# EAGLE board solarclock-touch-voltagelimit (EAGLE 5.11)
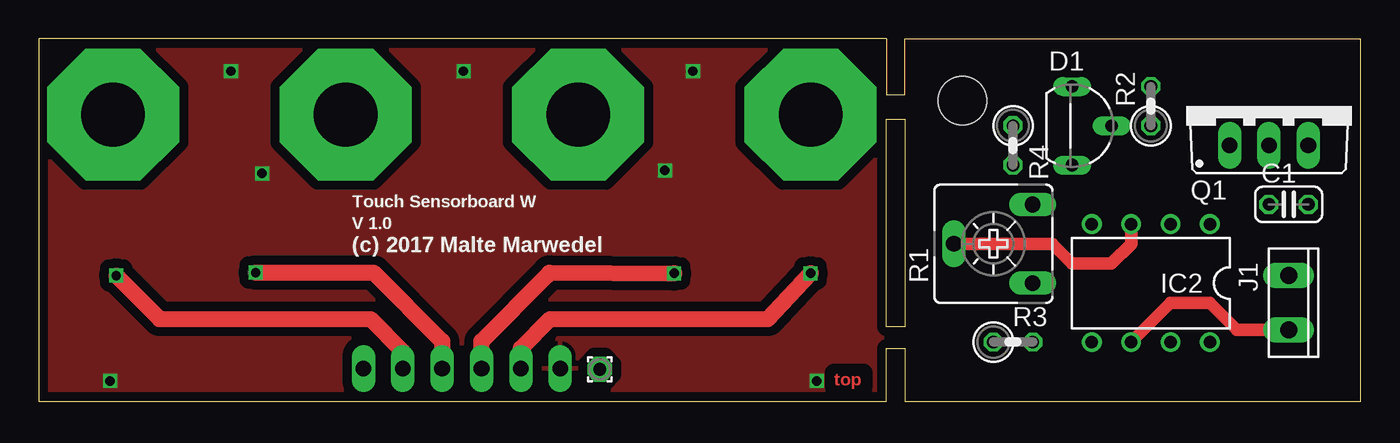
[diagram p0: board, top side]
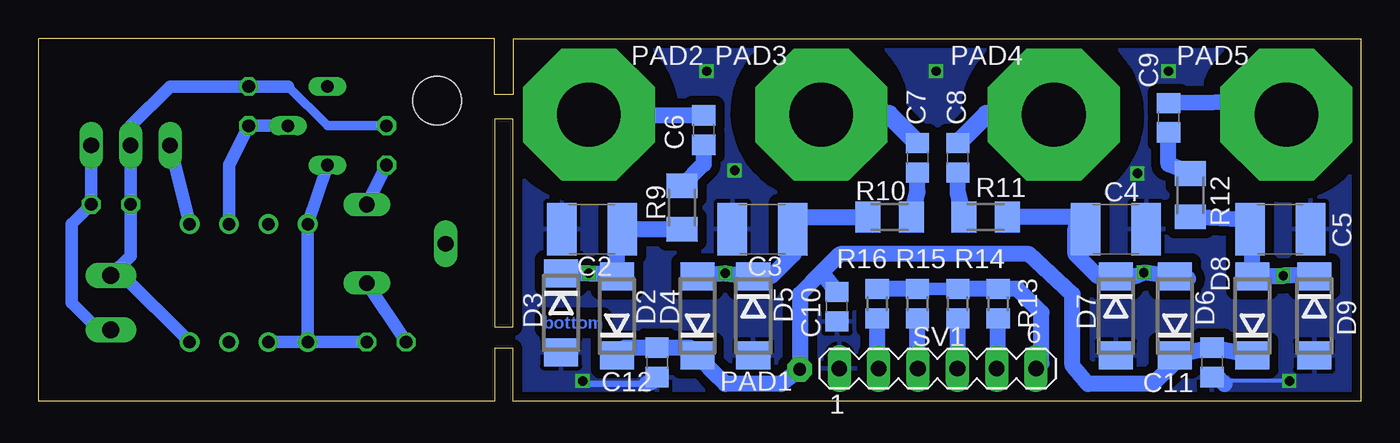
[diagram p1: board, bottom side, seen from below]

Size 85.3 x 23.4 mm. Coordinates in mm from the lower left corner, seen from the top.
Outline: 85.3,0 85.3,23.4 55.9,23.4 55.9,19.8 54.7,19.8 54.7,23.4 0,23.4 0,0 54.7,0 54.7,3.4 55.9,3.4 55.9,0 85.3,0
Outline: 55.9,18.2 55.9,4.8 54.7,4.8 54.7,18.2 55.9,18.2
Copper layers (1*16): Top 0.035mm / dielectric 1.6mm / Bottom 0.035mm
Design rules "Elecrow_2-layer_PCB_eagle_rule": minimum track width 6mil, minimum drill 12mil, track to track 6mil, track to pad 6mil, pad to pad 6mil, via to via 8mil, smd to smd 0mil, copper to edge 20mil, drill to drill 10mil, minimum pad ring 6mil, minimum via ring 6mil, stop-mask expansion 0mil, vias tented up to drill 100mil, thermal gap 10mil
Holes 3.1 mm at 59.6,19.4
bRestrict: 4 lines

## Footprints (pad centres in the part's own frame; a part is rotated, then mirrored left to right if it is on the bottom)
C025-024X044 = drill 0.813 octagon: 1 -1.27,0; 2 1.27,0
C1812 = smd 1.9 x 3.4: 1 -1.95,0; 2 1.95,0
C0805 = smd 1.3 x 1.5: 1 -0.95,0; 2 0.95,0
TO92L = drill 0.813 long: 1 0,-2.54; 2 2.54,0; 3 0,2.54
DO214AA = smd 1.8 x 2.2: A 2.55,0; C -2.55,0
DIL08 = drill 0.813 pad 1.27 round: 1 -3.81,-3.81; 2 -1.27,-3.81; 3 1.27,-3.81; 4 3.81,-3.81; 5 3.81,3.81; 6 1.27,3.81; 7 -1.27,3.81; 8 -3.81,3.81
RM3.5X02MTA = drill 1.1 long: 1 1.75,0; 2 -1.75,0
1,6/0,8 = drill 0.813 pad 1.6 octagon: 1 0,0
7O4,1 = drill 4.1 pad 8.5 octagon: 1 0,0
TO220BV = drill 1.016 long: D 0,-2.54; G -2.54,-2.54; S 2.54,-2.54
CA6V = drill 1.016 long: A -2.54,-2.54; E 2.54,-2.54; S 0,2.54
0207/2V = drill 0.813 octagon: 1 -1.27,0; 2 1.27,0
M1206 = smd 1.6 x 2: 1 -1.4,0; 2 1.4,0
R0805 = smd 1.3 x 1.5: 1 -0.95,0; 2 0.95,0
MA06-1 = drill 1.016 long: 1 -6.35,0; 2 -3.81,0; 3 -1.27,0; 4 1.27,0; 5 3.81,0; 6 6.35,0

## Placement (x,y rotation side)
C1  100nF  [C025-024X044]  80.64,12.7 0 top
C2  1nF  [C1812]  49.6,11.1 180 bottom
C3  1nF  [C1812]  38.6,11.1 180 bottom
C4  1nF  [C1812]  15.8,11.1 0 bottom
C5  1nF  [C1812]  5.2,11.1 0 bottom
C6  10nF  [C0805]  42.4,17.5 90 bottom
C7  10nF  [C0805]  28.6,15.7 90 bottom
C8  10nF  [C0805]  26,15.7 90 bottom
C9  10nF  [C0805]  12.4,18.3 90 bottom
C10  100nF  [C0805]  33.8,6.1 270 bottom
C11  100nF  [C0805]  9.6,2.5 270 bottom
C12  100nF  [C0805]  45.4,2.5 270 bottom
D1  LM385Z-1.2  [TO92L]  66.67,17.78 0 top
D2  SM6T18A  [DO214AA]  48,5.5 90 bottom
D3  SM6T18A  [DO214AA]  51.6,5.7 270 bottom
D4  SM6T18A  [DO214AA]  42.8,5.5 90 bottom
D5  SM6T18A  [DO214AA]  39.2,5.5 270 bottom
D6  SM6T18A  [DO214AA]  12,5.5 90 bottom
D7  SM6T18A  [DO214AA]  15.8,5.5 270 bottom
D8  SM6T18A  [DO214AA]  7,5.5 90 bottom
D9  SM6T18A  [DO214AA]  3,5.5 270 bottom
IC2  MCP6042P  [DIL08]  71.75,7.62 180 top
J1  Vcc Solar  [RM3.5X02MTA]  80.64,6.35 270 top
PAD1  Vcc  [1,6/0,8]  36.2,2.05 0 top
PAD2  Touch1  [7O4,1]  49.8,18.5 0 top
PAD3  Touch2  [7O4,1]  34.8,18.5 0 top
PAD4  Touch3  [7O4,1]  19.8,18.5 0 top
PAD5  Touch4  [7O4,1]  4.8,18.5 0 top
Q1  IRLZ34NVERTICAL  [TO220BV]  79.38,19.05 0 top
R1  100k  [CA6V]  61.59,10.16 90 top
R2  100k  [0207/2V]  71.75,19.05 90 top
R3  240k  [0207/2V]  62.87,3.81 0 top
R4  510k  [0207/2V]  62.87,16.51 270 top
R9  100k  [M1206]  43.8,12.5 270 bottom
R10  100k  [M1206]  30.4,11.9 180 bottom
R11  100k  [M1206]  24.2,11.9 0 bottom
R12  100k  [M1206]  11,13.3 270 bottom
R13  1M  [R0805]  23.4,6.3 90 bottom
R14  1M  [R0805]  26,6.3 90 bottom
R15  1M  [R0805]  28.6,6.3 90 bottom
R16  1M  [R0805]  31.2,6.3 90 bottom
SV1  Analog  [MA06-1]  27.3,2.1 0 bottom

## Library data of the parts
C1-C12 R2-R4 R9-R16 = rcl
D1 PAD2-PAD5 Q1 = maltes2_lib
D2-D9 = diode
IC2 = linear
J1 = maltes2_lib; OC_FARNELL: unknown; OC_NEWARK: unknown
PAD1 = wirepad
R1 = pot
SV1 = con-lstb; OC_FARNELL: unknown; OC_NEWARK: unknown

## Nets
GND: C1.2 D1.1 IC2.4 IC2.5 IC2.6 J1.1 Q1.S R3.2
GND1: C2.2 C3.2 C4.2 C5.2 C10.2 C11.2 C12.2 D3.A D5.A D7.A D9.A SV1.1
N$1: IC2.1 Q1.G
N$2: IC2.3 R1.S
N$3: D1.2 IC2.2 R2.1
N$4: R1.A R3.1
N$5: R1.E R4.2
N$6: C4.1 D6.A D7.C R11.2 R14.1 SV1.4
N$7: C5.1 D8.A D9.C R12.2 R13.1 SV1.5
N$8: C3.1 D4.A D5.C R10.2 R15.1 SV1.3
N$9: R13.2 R14.2 R15.2 R16.2 SV1.6
N$10: C2.1 D2.A D3.C R9.2 R16.1 SV1.2
N$11: C10.1 C11.1 C12.1 D2.C D4.C D6.C D8.C PAD1.1
N$12: C6.1 R9.1
N$13: C6.2 PAD2.1
N$14: C7.1 R10.1
N$15: C7.2 PAD3.1
N$16: C8.2 PAD4.1
N$17: C8.1 R11.1
N$18: C9.2 PAD5.1
N$19: C9.1 R12.1
VCC: C1.1 IC2.8 J1.2 Q1.D R2.2 R4.1

## Tracks (layer width: path | path; a pad name or v marks a point on that pad's centre or on a via)
GND
  Top 0.813: IC2.6 73.03,6.35 75.56,6.35 77.31,4.6 J1.1
  Bottom 0.813: IC2.5 IC2.6 | Q1.S C1.2 83.19,11.43 83.19,6.35 81.44,4.6 J1.1 | D1.1 IC2.4 IC2.5 | R3.2 IC2.5
GND1  (via drill 0.6)
  Bottom 0.254: v4.6,1.3 8.4,1.3 8.8,1.1 | C12.2 45.65,1.3
  Bottom 0.406: 46.1,1.1 50,1.1 v50.2,1.3
  Bottom 1.016: C11.2 9.15,1.45 8.8,1.1 | 45.65,1.3 45.8,1.2 46.1,1.1
  other vias: 12.4,21.3 27.4,21.3 42.2,21.3 14.4,14.7 40.4,14.9
  pour Bottom (isolate 0.6): 0,23.4 54.8,23.4 54.8,0 0,0
  pour Top (isolate 0.6): 0,23.4 54.8,23.4 54.8,0 0,0
N$1
  Bottom 0.813: IC2.1 Q1.G
N$2
  Top 0.813: IC2.3 70.48,10.16 69.22,8.89 66.67,8.89 65.41,10.16 R1.S
N$3
  Bottom 0.813: IC2.2 73.03,15.24 R2.1 D1.2
N$4
  Bottom 0.813: R3.1 R1.A
N$5
  Bottom 0.813: R4.2 R1.E
N$6  (via drill 0.6)
  Top 1.016: SV1.4 26.03,3.87 21.6,8.3 v14,8.3
  Bottom 1.016: R11.2 17.75,11.9 C4.1 18.4,11.15 18.4,9.5 16.95,8.05 D7.C 14.55,8.05 v14,8.3 11.15,7.9 D6.A | R14.1 26,2.13 SV1.4
N$7  (via drill 0.6)
  Top 1.016: SV1.5 23.49,3.21 21.4,5.3 7.8,5.3 v5,8.1
  Bottom 1.016: R12.2 7.2,11.7 7.4,11.7 C5.1 7,11.55 D8.A 5.05,8.05 v5,8.1 3.25,8.1 D9.C | R13.1 23.4,2.19 SV1.5
N$8  (via drill 0.6)
  Top 1.016: SV1.3 28.57,3.87 32.8,8.1 32.95,8.3 v41,8.25
  Bottom 1.016: D4.A v41,8.25 D5.C 39.75,8.1 38,8.1 36.6,9.5 36.6,11.05 C3.1 36.4,11.35 36.4,11.9 R10.2 | R15.1 28.6,2.13 SV1.3
N$9
  Bottom 0.813: R14.2 R15.2
  Bottom 1.016: R14.2 R13.2 22.15,7.25 20.6,5.7 20.6,2.45 SV1.6 | R15.2 R16.2
N$10  (via drill 0.6)
  Top 1.016: SV1.2 31.11,3.41 33,5.3 47.05,5.3 v49.8,8.25
  Bottom 1.016: R9.2 C2.1 48,10.75 D2.A 47.8,8.25 v49.8,8.25 D3.C | R16.1 31.2,2.19 SV1.2
N$11
  Bottom 1.016: 34.8,8.3 36.2,6.9 PAD1.1 37.4,1.1 41,1.1 41.8,1.9 D4.C 43.3,3.45 C12.1 47.5,3.45 D2.C | 34.8,8.3 C10.1 | 34.8,8.3 33.6,9.5 21.4,9.5 18.6,6.9 18.6,2.3 17.6,1.1 13.4,1.1 12.15,2.35 D6.C C11.1 D8.C
N$12
  Bottom 1.016: C6.1 42.4,15.3 R9.1
N$13
  Bottom 1.016: C6.2 49.75,18.45 PAD2.1
N$14
  Bottom 1.016: C7.1 28.6,13.5 R10.1
N$15
  Bottom 1.27: C7.2 30.45,18.5 PAD3.1
N$16
  Bottom 1.27: C8.2 24.15,18.5 PAD4.1
N$17
  Bottom 1.016: C8.1 26,13.5 R11.1
N$18
  Bottom 1.016: PAD5.1 6.55,19.3 C9.2
N$19
  Bottom 1.016: C9.1 12.4,15.3 R12.1
VCC
  Bottom 0.61: 69.22,20.32 66.67,17.78 R4.1
  Bottom 0.813: IC2.8 80.01,8.26 80.17,8.1 J1.2 79.38,9.37 C1.1 Q1.D 79.38,17.78 76.83,20.32 R2.2 69.22,20.32

## Text on the board
Top: top
Bottom: bottom
_tsilk: Touch Sensorboard W | V 1.0 | (c) 2017 Malte Marwedel